# Altium PCB PCB5.PcbDoc
Units mm, origin at the board's own origin, x right, y up, seen from the top; angles counter-clockwise.
Board outline 152.4 x 101.6 mm, 2 copper layers (Top Layer, Bottom Layer); 48 components, 36 nets, 179 pads, 0 vias.
Unrouted connection lines stored in the file: 125.
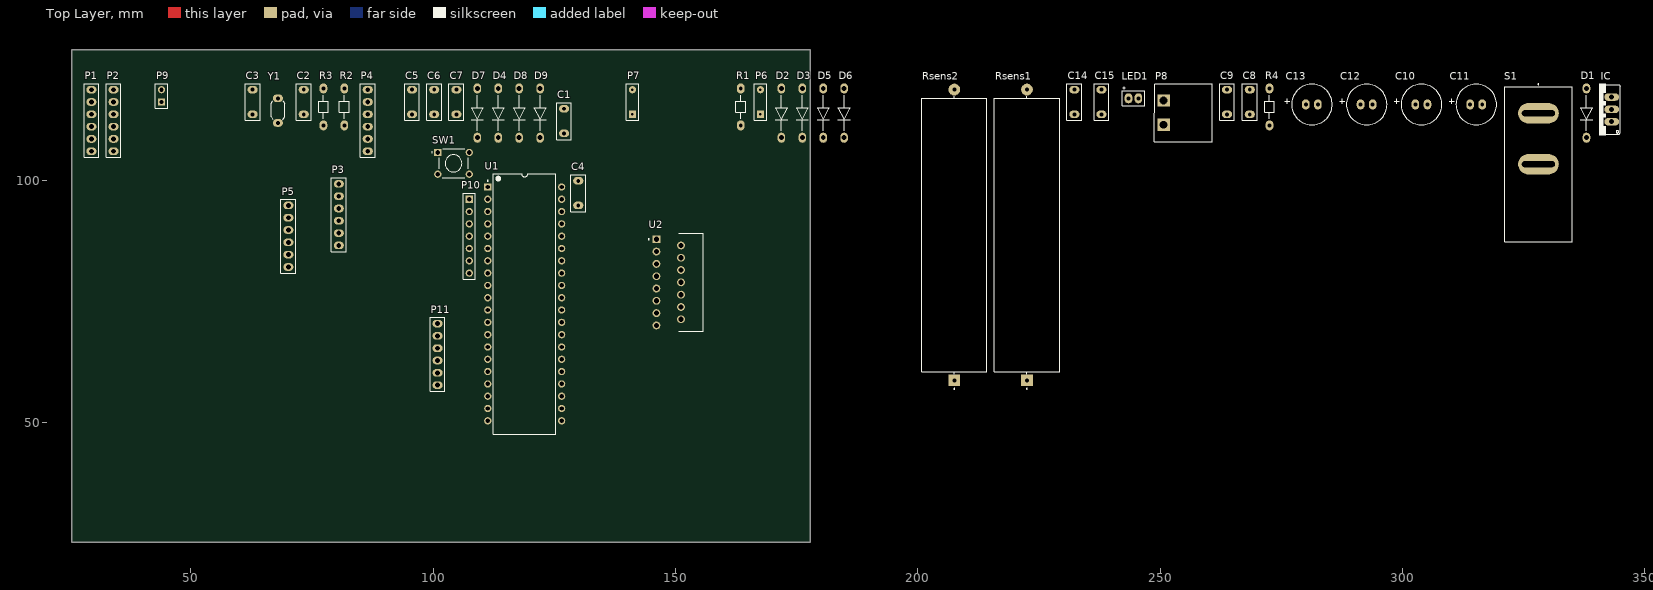
[diagram p0: Top Layer view]
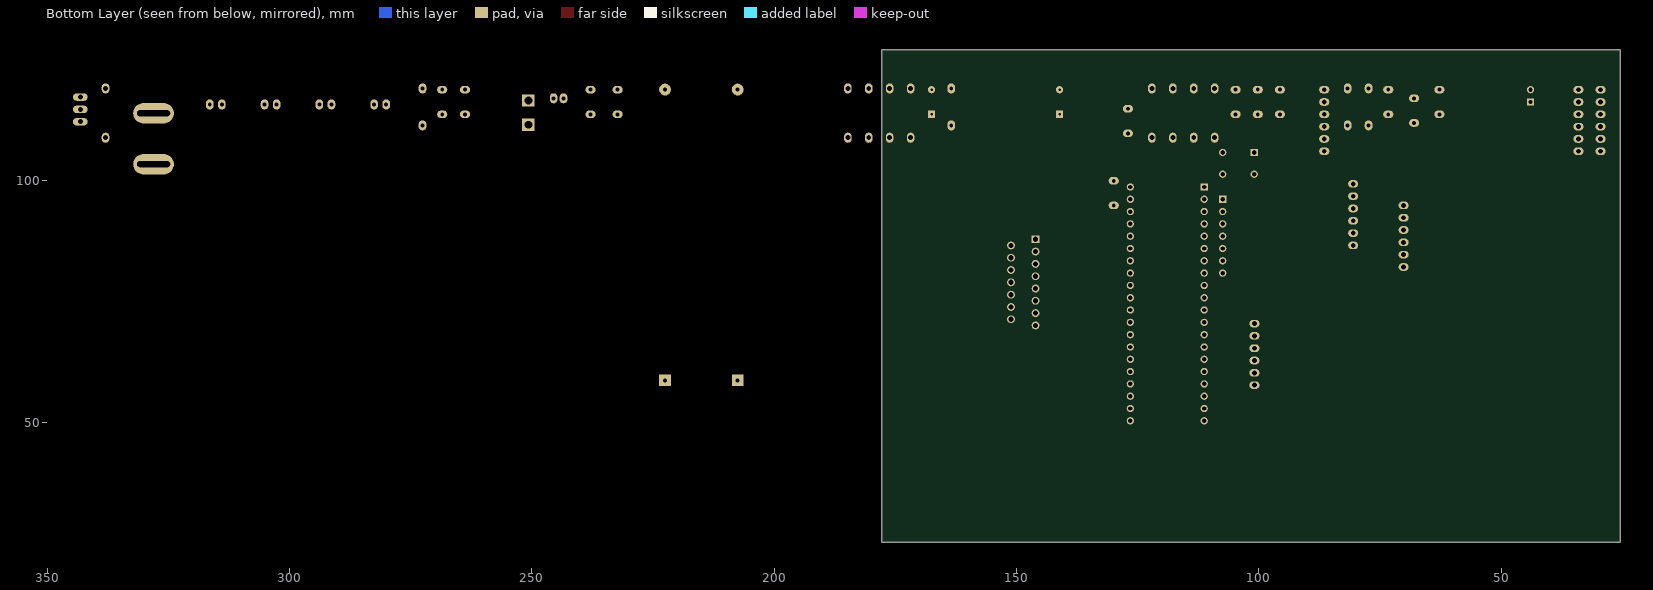
[diagram p1: Bottom Layer view, seen from below]

## Layer stack, top to bottom
Top Solder: solder mask 0.0102, Solder Resist, Dk 3.5
Top Layer: signal copper 0.0356
Dielectric 1: dielectric 0.32, FR-4, Dk 4.8
Bottom Layer: signal copper 0.0356
Bottom Solder: solder mask 0.0102, Solder Resist, Dk 3.5

## Board outline
25.4,25.4 177.8,25.4 177.8,127 25.4,127

## Design rules (kind name [scope] priority, off if disabled: settings)
Clearance [All] p1: gap=0.7 ignorepadtopadclearanceinfootprint=FALSE
PolygonConnect [All] p1: connectstyle=Relief reliefconductorwidth=0.254 reliefentries=4 polygonreliefangle="90 Angle" airgapwidth=0.254
RoutingVias [All] p1: holewidth=0.711 width=1.27 viastyle="Through Hole" minholewidth=0.711 minwidth=1.27 maxholewidth=0.711 maxwidth=1.27
SolderMaskExpansion [All] p1: expansion=0.102
Width [All] p1: maxlimit=1 minlimit=0.8 preferedwidth=0.8
30 further rules are at their usual default settings.

## Components (designator, comment, footprint, x,y, rotation, side; value= is the part's Value field where it differs from the comment)
C1 "Cap" CAP200 127,109.728 r90 top value=100nF
C2 "Cap" CAP200 73.279,113.665 r90 top value=33pF
C3 "Cap" CAP200 62.738,113.665 r90 top value=33pF
C4 "Cap" CAP200 129.921,94.869 r90 top value=100nF
C5 "Cap" CAP200 95.631,113.665 r90 top value=100nF
C6 "Cap" CAP200 100.203,113.665 r90 top value=100nF
C7 "Cap" CAP200 104.775,113.665 r90 top value=100nF
C8 "Cap" CAP200 268.478,113.665 r90 top value=100nF
C9 "Cap" CAP200 263.779,113.665 r90 top value=100nF
C10 "Cap Pol1" RAD4 302.641,115.697 r0 top value=470uF
C11 "Cap Pol1" RAD4 313.944,115.697 r0 top value=470uF
C12 "Cap Pol1" RAD4 291.338,115.697 r0 top value=470uF
C13 "Cap Pol1" RAD4 280.035,115.697 r0 top value=470uF
C14 "Cap" CAP200 232.283,113.665 r90 top value=100nF
C15 "Cap" CAP200 237.871,113.665 r90 top value=100nF
D1 "Diode 1N4007" DIODE400 337.947,114.173 r90 top
D2 "Diode 1N5402" DIODE400 171.831,114.173 r90 top
D3 "Diode 1N5402" DIODE400 176.149,114.173 r90 top
D4 "Diode 1N5402" DIODE400 113.411,114.173 r90 top
D5 "Diode 1N5402" DIODE400 180.467,114.173 r90 top
D6 "Diode 1N5402" DIODE400 184.785,114.173 r90 top
D7 "Diode 1N5402" DIODE400 109.093,114.173 r90 top
D8 "Diode 1N5402" DIODE400 117.729,114.173 r90 top
D9 "Diode 1N5402" DIODE400 122.047,114.173 r90 top
IC "L7805" 78XXS 340.614,114.681 r90 top
LED1 "GREEN" LED_2 244.475,117.348 r0 top
P1 "5V" HEADER_6 29.464,112.395 r0 top
P2 "GND" HEADER_6 34.036,112.395 r0 top
P3 "Programator" HEADER_6 80.518,92.964 r0 top
P4 "Bluetooth" HEADER_6 86.487,112.395 r0 top
P5 "FT232" HEADER_6 70.104,88.519 r0 top
P6 "Motor 1" KLEMA 167.513,116.332 r90 top
P7 "Motor 2" KLEMA 141.097,116.332 r90 top
P8 "2EDGRC-5.08-02P-14-00A(H)" PWR_Con 254.762,114.427 r0 top
P9 "Interrupt" HDR1X2 43.942,116.205 r90 top
P10 "GPIO" HDR1X7 107.442,96.139 r270 top
P11 "FT232" HEADER_6 100.889,64.135 r0 top
R1 "Res1" RES400 163.449,115.189 r90 top value=10K
R2 "Res1" RES400 81.661,115.189 r90 top value=4.7K
R3 "Res1" RES400 77.343,115.189 r90 top value=10K
R4 "Res1" RES400 272.542,115.189 r90 top value=1K
Rsens1 "15W" Rsens 222.504,88.773 r90 top value=5
Rsens2 "15W" Rsens 207.518,88.773 r90 top value=5
S1 "" SW_RB141C1100 328.041,103.378 r90 top
SW1 "TASTER" SW_1825910-6-4 104.192,103.556 r0 top
U1 "DSPIC30F4013-20I/P" PDIP600-P40 118.872,74.549 r0 top
U2 "L298N" TO127P2020X500X2100-15 146.05,87.884 r0 top
Y1 "XTAL" OSC_5 67.945,114.808 r0 top

## Footprints (in the part's own frame and the unit in brackets; to place one, negate y for a bottom-side part, rotate by r counter-clockwise, add the part's x,y. Pads: shape width x height; smd on the part's side, far side on the other; paste and mask are expansions set on the pad)
78XXS [mil]
  oval 60x120 hole 40: GND(0,-100) IN(-100,-100) OUT(100,-100)
  silkscreen extent -210,-170 210,0
CAP200 [mil]
  oval 62x82 hole 32: 1(0,0) 2(200,0)
  silkscreen extent -50,-60 250,60
DIODE400 [mil]
  oval 82x62 hole 40: 1(190,0) 2(-210,0)
  silkscreen extent -155,-50 135,50
HDR1X2 [mm] "Connector; Header; 2 Position"
  rect 1.5x1.5 hole 0.9: 1(0,0)
  round 1.5 hole 0.9: 2(2.54,0)
  silkscreen extent -1.27,-1.27 3.81,1.27
HDR1X7 [mm] "Connector; Header; 7 Position"
  rect 1.5x1.5 hole 0.9: 1(0,0)
  round 1.5 hole 0.9: 2(2.54,0) 3(5.08,0) 4(7.62,0) 5(10.16,0) 6(12.7,0) 7(15.24,0)
  silkscreen extent -1.27,-1.27 16.51,1.27
HEADER_6 [mil]
  oval 82x62 hole 39.37: 1(0,250) 2(0,150) 3(0,50) 4(0,-50) 5(0,-150) 6(0,-250)
  silkscreen extent -60,-300 60,300
KLEMA [mm] "Connector; Header; 2 Position"
  rect 1.5x1.5 hole 0.5: 1(-2.667,0)
  round 1.5 hole 0.5: 2(2.413,0)
  silkscreen extent -3.94,-1.27 3.68,1.27
LED_2 [mil]
  oval 62x82 hole 32: 1(40,-15) 2(-40,-15)
  silkscreen extent -90,-75 90,80, body extent -105,-126 110,106, height 346
OSC_5 [mil]
  oval 82x62 hole 32: 1(0,-115) 2(0,85)
  silkscreen extent -55,-90 55,65, body extent -92,-240 92,207, height 138
PDIP600-P40 [mm] "DIP, 40-Leads, Row Spacing 15.24mm, Pitch 2.54mm, Body 51.8x13.5mm"
  rect 1.5x1.5 hole 0.9: 1(-7.62,24.13)
  round 1.5 hole 0.9: 2(-7.62,21.59) 3(-7.62,19.05) 4(-7.62,16.51) 5(-7.62,13.97) 6(-7.62,11.43) 7(-7.62,8.89) 8(-7.62,6.35) 9(-7.62,3.81) 10(-7.62,1.27) 11(-7.62,-1.27) 12(-7.62,-3.81) 13(-7.62,-6.35) 14(-7.62,-8.89) 15(-7.62,-11.43) 16(-7.62,-13.97) 17(-7.62,-16.51) 18(-7.62,-19.05) 19(-7.62,-21.59) 20(-7.62,-24.13) 21(7.62,-24.13) 22(7.62,-21.59) 23(7.62,-19.05) 24(7.62,-16.51) 25(7.62,-13.97) 26(7.62,-11.43) 27(7.62,-8.89) 28(7.62,-6.35) 29(7.62,-3.81) 30(7.62,-1.27) 31(7.62,1.27) 32(7.62,3.81) 33(7.62,6.35) 34(7.62,8.89) 35(7.62,11.43) 36(7.62,13.97) 37(7.62,16.51) 38(7.62,19.05) 39(7.62,21.59) 40(7.62,24.13)
  silkscreen extent -7.74,-26.85 6.45,26.85, body extent -7.3,-26.85 7.3,26.85, height 6.35
PWR_Con [mil]
  rect 100x100 hole 62.99: 1(-160,-115) 2(-160,83)
  silkscreen extent -234,-253 236,217, body extent -239,-256 234,222, height 344
RAD4 [mil]
  oval 62x82 hole 32: 1(0,0) 2(98.43,0)
  silkscreen extent -170,-165 215,165
RES400 [mil]
  oval 82x62 hole 32: 1(-150,0) 2(150,0)
  silkscreen extent -95,-40 95,40
Rsens [mm]
  round 2.43 hole 0.8: A(30,0)
  rect 2.43x2.43 / inner round 2.43 / far side rect 2.43x2.43 hole 0.8: C(-30,0)
  silkscreen extent -31.85,-6.73 28.57,6.73
SW_1825910-6-4 [mm]
  rect 1.498x1.498 hole 0.99: 1(-3.25,2.25)
  round 1.498 hole 0.99: 2(3.25,2.25) 3(-3.25,-2.25) 4(3.25,-2.25)
  silkscreen extent -4.54,-3 3,3
SW_RB141C1100 [mm]
  oval 4.2x8.4 hole 1.2 slot 6.8 at 90 deg: 1(10.5,0) 2(0,0)
  silkscreen extent -16,-7 16.6,7, body extent -16.35,-7 16.35,7, height 24.57
TO127P2020X500X2100-15 [mm]
  rect 1.62x1.62 hole 1.08: 1(0,0)
  round 1.62 hole 1.08: 2(5.08,-1.27) 3(0,-2.54) 4(5.08,-3.81) 5(0,-5.08) 6(5.08,-6.35) 7(0,-7.62) 8(5.08,-8.89) 9(0,-10.16) 10(5.08,-11.43) 11(0,-12.7) 12(5.08,-13.97) 13(0,-15.24) 14(5.08,-16.51) 15(0,-17.78)
  silkscreen extent -1.69,-18.99 9.63,1.21

## Part data
C1 C2 C3 C4 C5 C6 C7 C8 C9 C14 C15: "Capacitor", LatestRevisionDate=17-Jul-2002, LatestRevisionNote="Re-released for DXP Platform.", PackageDescription="Radial Cap, Thru-Hole; 2 Leads; 0.3 in Pin Spacing", PackageReference=RAD-0.3, Published=8-Jun-2000, Publisher="Altium Limited"
C10 C11 C12 C13: "Polarized Capacitor (Radial)", LatestRevisionDate=17-Jul-2002, LatestRevisionNote="Re-released for DXP Platform.", PackageDescription="Polarized Capacitor (Radial); 2 Leads", PackageReference=RB7.6-15, Published=8-Jun-2000, Publisher="Altium Limited"
D1: "1 Amp General Purpose Rectifier", Code_JEDEC=DO-204-AL, ComponentLink1Description="Manufacturer Link", ComponentLink1URL=http://www.fairchildsemi.com/, ComponentLink2Description=Datasheet, ComponentLink2URL=http://www.fairchildsemi.com/ds/1N%2F1N4001.pdf, DatasheetVersion=1998, LatestRevisionDate=17-Jul-2002, LatestRevisionNote="Re-released for DXP Platform.", PackageDescription="Diode, Axial; Body 5.2 x 2.7 mm (LxDia. max), Lead Dia. 0.86 mm (max)", PackageReference=DO-41, PackageVersion=Aug-1999, Published=8-Jun-2000, Publisher="Altium Limited"
D2 D3 D4 D5 D6 D7 D8 D9: "3 Amp General Purpose Rectifier", ComponentLink1Description="Manufacturer Link", ComponentLink1URL=http://www.fairchildsemi.com/, ComponentLink2Description=Datasheet, ComponentLink2URL=http://www.fairchildsemi.com/ds/1N%2F1N5400.pdf, DatasheetVersion=1998, LatestRevisionDate=17-Jul-2002, LatestRevisionNote="Re-released for DXP Platform.", PackageDescription="Diode, Axial; Body 9.5 x 5.6 mm (LxDia. max), Lead Dia. 1.32 mm (max)", PackageReference=DO-201AD, PackageVersion=Aug-1999, Published=8-Jun-2000, Publisher="Altium Limited"
IC: "Linear Voltage Regulator IC 1 Output 1.5A D2PAK", Package="TO-263-3 Inchange Semiconductor", Availability=Unavailable, MF=STMicroelectronics, MP=L7805, Price=None, SnapEDA_Link=https://www.snapeda.com/parts/L7805/STMicroelectronics/view-part/563125/?ref=snap
LED1: library part LED1, "Typical RED GaAs LED", LatestRevisionDate=08-Jul-2005, LatestRevisionNote="Mech Layer 1 removed.", PackageDescription="LED; 2 Leads", PackageReference=LED-1, Published=8-Jun-2000, Publisher="Altium Limited"
P1 P2 P3 P4 P5 P11: library part "Header 6", "Header, 6-Pin", LatestRevisionDate=17-Jul-2002, LatestRevisionNote="Re-released for DXP Platform.", Publisher="Altium Limited"
P6 P7 P9: library part "Header 2", "Header, 2-Pin", LatestRevisionDate=17-Jul-2002, LatestRevisionNote="Re-released for DXP Platform.", Publisher="Altium Limited"
P8: library part 00000002, "TERM BLOCK HDR 2POS 90DEG 5.08MM", Manufacturer Part Number=2EDGRC-5.08-02P-14-00A(H), Price=0.1304, Suplier=TME, Suplier Product Link=https://www.tme.eu/en/details/2edgrc5.08-2p14/pluggable-terminal-blocks/degson-electronics/2edgrc-508-02p-14-00ah/
P10: library part "Header 7", "Header, 7-Pin", LatestRevisionDate=17-Jul-2002, LatestRevisionNote="Re-released for DXP Platform.", Publisher="Altium Limited"
R1 R2 R3 R4: "Resistor", LatestRevisionDate=17-Jul-2002, LatestRevisionNote="Re-released for DXP Platform.", PackageDescription="Axial Device, Thru-Hole; 2 Leads; 0.3 in Pin Spacing", PackageReference=AXIAL-0.3, Published=8-Jun-2000, Publisher="Altium Limited"
Rsens1 Rsens2: library part Res1, "Resistor", LatestRevisionDate=17-Jul-2002, LatestRevisionNote="Re-released for DXP Platform.", PackageDescription="Axial Device, Thru-Hole; 2 Leads;", Published=8-Jun-2000, Publisher="Altium Limited"
S1: library part RB141C1100, "Rocker Switches 15A 125VAC, OFF-ON, Black Rocker, No Markings", Package=None, Availability="In Stock", Check_prices=https://www.snapeda.com/parts/RB141C1100/ITC/view-part/?ref=eda, MF="e-switch inc", MP=RB141C1100, Price=None, Purchase-URL=https://pricing.snapeda.com/search/part/RB141C1100/?ref=eda, SnapEDA_Link=https://www.snapeda.com/parts/RB141C1100/ITC/view-part/?ref=snap
SW1: library part 1825910-6, "Switch Tactile OFF (ON) SPST Round Button PC Pins 0.05A 24VDC 100000Cycles 1.57N Thru-Hole Loose", Package=None, Availability=Unavailable, MP=1825910-6, Price=None
U1: "High-Performance 16-bit Digital Signal Controller, 48 KB Flash, 2 KB SRAM, 1 KB EEPROM, 40-Pin PDIP, Industrial Temperature", Supplier Part Number 1=DSPIC30F4013-20IP-ND, ComponentLink1Description=Datasheet, ComponentLink1URL=http://ww1.microchip.com/downloads/en/DeviceDoc/70138F.pdf, ComponentLink2Description="Packaging Specification", ComponentLink2URL=http://www.microchip.com/stellent/groups/techpub_sg/documents/packagingspec/en012702.pdf, ComponentLink3Description="Microchip.com Home", ComponentLink3URL=http://www.microchip.com/, DatasheetVersion="revF, Apr-2008", PackageDescription="40-Lead Plastic Dual In-Line (P) - 600 mil Body [PDIP]", PackageReference=PDIP600-P40, PackageVersion="revBB, Aug-2009", Published=29-Jan-2009, Publisher="Altium Limited", Supplier 1=Digi-Key, Supplier 2=Farnell, Supplier Part Number 2=1439755
U2: "Dual Full Bridge Motor Driver 15-Pin(15+Tab) MULTIWATT V Tube", Package=None, Availability=Unavailable, MP=L298N, Price=None
Y1: "Crystal Oscillator", LatestRevisionDate=17-Jul-2002, LatestRevisionNote="Re-released for DXP Platform.", PackageDescription="Crystal, Thru-Hole; 2 Leads; Body 3.1 x 8.2 mm (Dia.xH)", PackageReference=R38, Published=8-Jun-2000, Publisher="Altium Limited"

## Nets (pads, with @x,y where several pads share a name; then routed paths per layer and width w, separated by ;. In a path a pad name is that pad's centre, name@x,y a point inside that pad or via, vN(x,y) a via of type N, cw(c..) or ccw(c..) an arc to the next point about the centre after c; other vN are vias at no path point)
+5: C4.2 C5.2 C6.2 C7.2 C8.2 C10.1 C11.1 C14.2 IC.OUT P1.1 P1.2 P1.3 P1.4 P1.5 P1.6 P3.2 P4.2 P5.4 P11.4 R1.2 R4.2 U1.11 U1.21 U1.32 U1.40 U2.9
GND: C1.1 C2.1 C3.1 C4.1 C5.1 C6.1 C7.1 C8.1 C9.1 C10.2 C11.2 C12.2 C13.2 C14.1 C15.1 D4.1 D7.1 D8.1 D9.1 IC.GND LED1.2 P2.1 P2.2 P2.3 P2.4 P2.5 P2.6 P3.3 P4.3 P5.6 P8.1 P11.6 R3.1 SW1.1 SW1.2 U1.12 U1.20 U1.31 U1.39 U2.8
INT0: P9.1 U1.17
INT2: P9.2 U1.18
MCLR: C1.2 P3.1 R1.1 SW1.3 SW1.4 U1.1
NetC9_2: C9.2 C12.1 C13.1 D1.2 IC.IN
NetLED1_1: LED1.1 R4.1
NetP4_5: P4.5 R2.1 R3.2
NetP8_2: P8.2 S1.2
OSC1: C2.2 U1.13 Y1.2
OSC2: C3.2 U1.14 Y1.1
OUT1: D2.1 D7.2 P6.1 U2.2
OUT2: D3.1 D4.2 P6.2 U2.3
OUT3: D5.1 D8.2 P7.1 U2.13
OUT4: D6.1 D9.2 P7.2 U2.14
PGC: P3.5 P10.7 U1.8
PGD: P3.4 U1.9
PWM1: U1.34 U2.6
PWM2: U1.33 U2.11
RB0: P10.1 U1.2
RB1: P10.2 U1.3
RB2: P10.3 U1.4
RB3: P10.4 U1.5
RB4: P10.5 U1.6
RB5: P10.6 U1.7
RB9: U1.38 U2.10
RB10: U1.37 U2.12
RB11: U1.36 U2.1
RB12: U1.35 U2.15
RF0: U1.30 U2.5
RF1: U1.29 U2.7
U1ARX: P11.3 U1.16
U1ATX: P11.2 U1.15
U2RX: P4.4 P5.3 U1.28
U2TX: P5.2 R2.2 U1.27
VCC: C15.2 D1.1 D2.2 D3.2 D5.2 D6.2 S1.1 U2.4
pads on no net: P3.6 P4.1 P4.6 P5.1 P5.5 P11.1 P11.5 Rsens1.A Rsens1.C Rsens2.A Rsens2.C U1.10 U1.19 U1.22 U1.23 U1.24 U1.25 U1.26

## Text inside footprints (layer, text, board x,y; h text height)
IC: Mechanical 13 "O" at 344.427,116.587 h1.27 r90; Mechanical 13 "I" at 344.429,111.502 h1.27 r90; Mechanical 13 "-" at 344.426,114.046 h1.27 r90